# EAGLE board blink1_b1a (EAGLE 5.11)
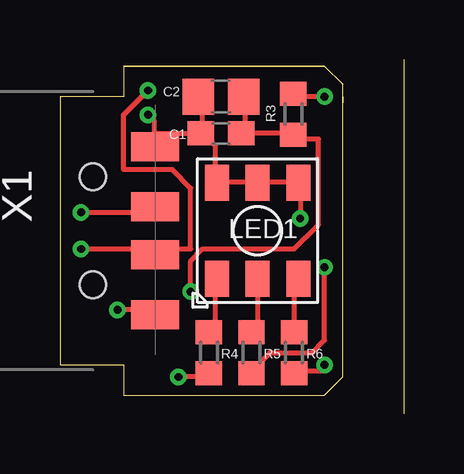
[diagram p0: board, top side]
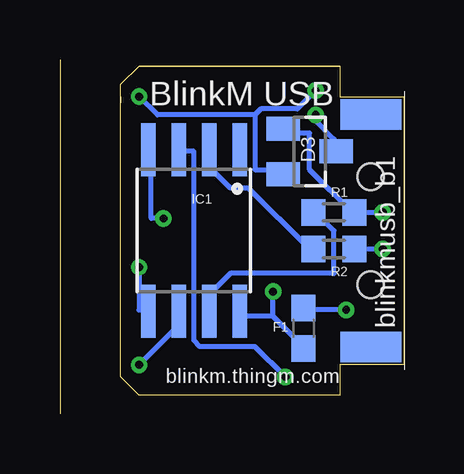
[diagram p1: board, bottom side, seen from below]

Size 14.34 x 14.73 mm. Coordinates in mm from the lower left corner, seen from the top.
Outline: 2.66,0.76 2.66,2.03 0,2.03 0,13.21 2.66,13.21 2.66,14.48
Outline: 2.66,0.76 10.53,0.76 10.78,0.76 11.04,0.76
Outline: 11.8,1.52 11.8,1.78 11.8,2.29
Outline: 11.8,2.29 11.8,12.95
Outline: 11.8,12.95 11.8,13.46 11.8,13.72
Outline: 11.04,14.48 10.78,14.48 10.53,14.48 2.66,14.48
Outline: 11.8,2.03 11.8,2.29
Outline: 11.8,13.21 11.8,12.95
Outline: 14.34,14.73 14.34,0
Outline: 11.04,14.48 11.8,13.72
Outline: 11.04,0.76 11.8,1.52
Outline: 2.66,14.48 11.04,14.48
Outline: 2.66,0.76 11.04,0.76
Outline: 11.8,1.52 11.8,13.72
Copper layers (1*16): Top 0.0356mm / dielectric 1.5011mm / Bottom 0.0356mm
Design rules "LaenPCBOrder *": minimum track width 8mil, minimum drill 13mil, track to track 6mil, track to pad 8mil, pad to pad 8mil, via to via 8mil, smd to smd 6mil, copper to edge 15mil, drill to drill 8mil, minimum pad ring 7mil, minimum via ring 7mil, stop-mask expansion 4mil, vias tented up to drill 25mil, thermal gap 10mil

## Footprints (pad centres in the part's own frame; a part is rotated, then mirrored left to right if it is on the bottom)
C0603 = smd 1.1 x 1: 1 -0.85,0; 2 0.85,0
C0805 = smd 1.3 x 1.5: 1 -0.95,0; 2 0.95,0
SOT23 = smd 1 x 1.4: 1 -0.95,-1.1; 2 0.95,-1.1; 3 0,1.1
0603 = smd 1.1 x 1: 1 -0.85,0; 2 0.85,0
SO08-EIAJ = smd 0.61 x 2.21: 1 -1.905,-3.378; 2 -0.635,-3.378; 3 0.635,-3.378; 4 1.905,-3.378; 5 1.905,3.353; 6 0.635,3.353; 7 -0.635,3.353; 8 -1.905,3.353
LED_5050 = smd 1 x 1.5: P$1 1.7,2; P$2 0,2; P$3 -1.7,2; P$4 -1.7,-2; P$5 0,-2; P$6 1.7,-2
R0603 = smd 1 x 1.1: 1 -0.85,0; 2 0.85,0
MOLEX-48037-1000 = smd 2 x 1.2: 1 2.6,-3.5; 2 2.6,-1; 3 2.6,1; 4 2.6,3.5 | smd 2.54 x 1.27 bottom: P$1 0,4.85; P$2 0,-4.85 | hole 1.1: 0,2.25; 0,-2.25

## Placement (x,y rotation side)
C1  [C0603]  6.72,11.68 180 top
C2  10uF  [C0805]  6.72,13.21 180 top
D3  [SOT23]  3.93,10.92 270 bottom
F1  PTC0603  [0603]  4.18,3.56 270 bottom
IC1  ATTINY45SOIC  [SO08-EIAJ]  8.75,7.62 180 bottom
LED1  LED_RGB_5050  [LED_5050]  8.24,7.62 180 top
R1  68  [R0603]  2.91,8.38 0 bottom
R2  68  [R0603]  2.91,6.86 0 bottom
R3  1k5  [R0603]  9.74,12.48 90 top
R4  100  [R0603]  6.21,2.54 90 top
R5  100  [R0603]  7.99,2.54 90 top
R6  60  [R0603]  9.77,2.54 90 top
X1  USB  [MOLEX-48037-1000]  1.38,7.62 0 top

## Library data of the parts
C1 C2 R1-R6 = rcl
D3 = diode
F1 = SparkFun-20110517
IC1 LED1 X1 = todstuff

## Nets
BLU: IC1.6 R6.1
D+: IC1.7 R1.1
D-: IC1.2 R2.1
GND: C1.2 C2.2 D3.3 IC1.4 LED1.P$4 LED1.P$5 LED1.P$6 X1.4
GRN: IC1.5 R5.1
N$4: D3.1 R1.2 X1.3
N$5: D3.2 R2.2 R3.2 X1.2
N$13: F1.1 X1.1
RBLU: LED1.P$3 R6.2
RED: IC1.3 R4.1
RGRN: LED1.P$2 R5.2
RRED: LED1.P$1 R4.2
RST: IC1.1
VCC: C1.1 C2.1 F1.2 IC1.8 R3.1

## Tracks (layer width: path | path; a pad name or v marks a point on that pad's centre or on a via)
BLU  (via drill 0.33)
  Top 0.203: v11.04,2.03 11.04,1.78 9.77,1.78 R6.1
  Bottom 0.203: v11.04,2.03 9.51,3.56 9.51,4.06 IC1.6
D+
  Bottom 0.203: R1.1 3.67,8.38 2.91,7.62 2.91,5.84 7.23,5.84 7.99,5.08 7.99,4.32 IC1.7
D-
  Bottom 0.203: R2.1 3.93,6.86 6.47,9.4 7.23,9.4 7.99,10.16 7.99,10.92 IC1.2
GND  (via drill 0.33)
  Top 0.203: 5.96,11.68 5.96,13.21 C2.2 | C1.2 5.96,11.68 | v3.67,12.45 3.93,12.19 3.93,11.68 | 3.93,11.68 3.93,11.18 X1.4 3.93,11.68 | 3.93,11.68 5.7,11.68 C1.2 | 8.24,9.65 6.72,9.65 LED1.P$6 6.47,9.65 6.47,11.18 5.96,11.68 | 8.24,9.65 LED1.P$5 8.24,9.65 | 8.24,9.65 9.77,9.65 LED1.P$4 10.02,9.4 v10.02,8.13 | C1.2 5.96,11.68
  Bottom 0.203: v3.67,12.45 3.67,12.19 2.91,11.43 2.91,10.92 D3.3 | v10.02,8.13 10.53,8.13 10.53,10.92 IC1.4
GRN  (via drill 0.33)
  Top 0.203: v11.04,6.1 11.04,3.05 10.53,2.54 8.75,2.54 7.99,1.78 R5.1
  Bottom 0.203: v11.04,6.1 11.04,4.32 10.78,4.32 IC1.5
N$4  (via drill 0.33)
  Top 0.203: v0.88,8.38 3.93,8.38 X1.3
  Bottom 0.203: D3.1 4.94,11.68 3.93,11.68 3.93,10.16 2.15,8.38 R1.2 1.89,8.38 v0.88,8.38
N$5  (via drill 0.33)
  Top 0.203: v0.88,6.86 3.93,6.86 X1.2 4.18,6.86 5.45,6.86 5.45,9.4 4.69,10.16 2.66,10.16 2.66,12.45 v3.67,13.46 | v11.04,13.21 9.77,13.21 R3.2
  Bottom 0.203: v0.88,6.86 1.89,6.86 R2.2 | v11.04,13.21 10.28,12.45 6.21,12.45 | 6.21,12.45 6.21,10.16 5.2,10.16 D3.2 | v3.67,13.46 4.43,12.7 5.96,12.7 6.21,12.45
N$13  (via drill 0.33)
  Top 0.203: v2.4,4.32 3.93,4.32 X1.1
  Bottom 0.203: v2.4,4.32 4.18,4.32 F1.1
RBLU
  Top 0.203: R6.2 9.77,3.56 9.77,5.59 LED1.P$3
RED  (via drill 0.33)
  Top 0.203: v4.94,1.52 6.21,1.52 R4.1
  Bottom 0.203: v4.94,1.52 6.21,2.79 8.5,2.79 8.75,3.05 8.75,10.92 9.26,10.92 IC1.3
RGRN
  Top 0.203: R5.2 7.99,3.56 8.24,3.81 8.24,5.59 LED1.P$2
RRED
  Top 0.203: R4.2 6.21,3.56 6.47,3.81 6.47,5.59 LED1.P$1
VCC  (via drill 0.33)
  Top 0.203: 7.74,11.68 7.74,13.21 C2.1 | 7.74,11.68 C1.1 7.74,11.68 | 7.74,11.68 9.51,11.68 R3.1 9.77,11.43 10.78,11.43 10.78,7.87 9.77,6.86 5.96,6.86 5.45,6.35 v5.45,5.08
  Bottom 0.203: 5.45,4.06 4.18,2.79 F1.2 | 5.45,4.06 6.72,4.06 IC1.8 | 5.45,4.06 v5.45,5.08

## Text on the board
bPlace: BlinkM USB | blinkmusb_b1 | blinkm.thingm.com